# Altium PCB PCB1.PcbDoc
Units mm, origin at the board's own origin, x right, y up, seen from the top; angles counter-clockwise.
Board outline 46.99 x 78.23 mm, 2 copper layers (Top Layer, Bottom Layer); 55 components, 62 nets, 252 pads, 46 vias.
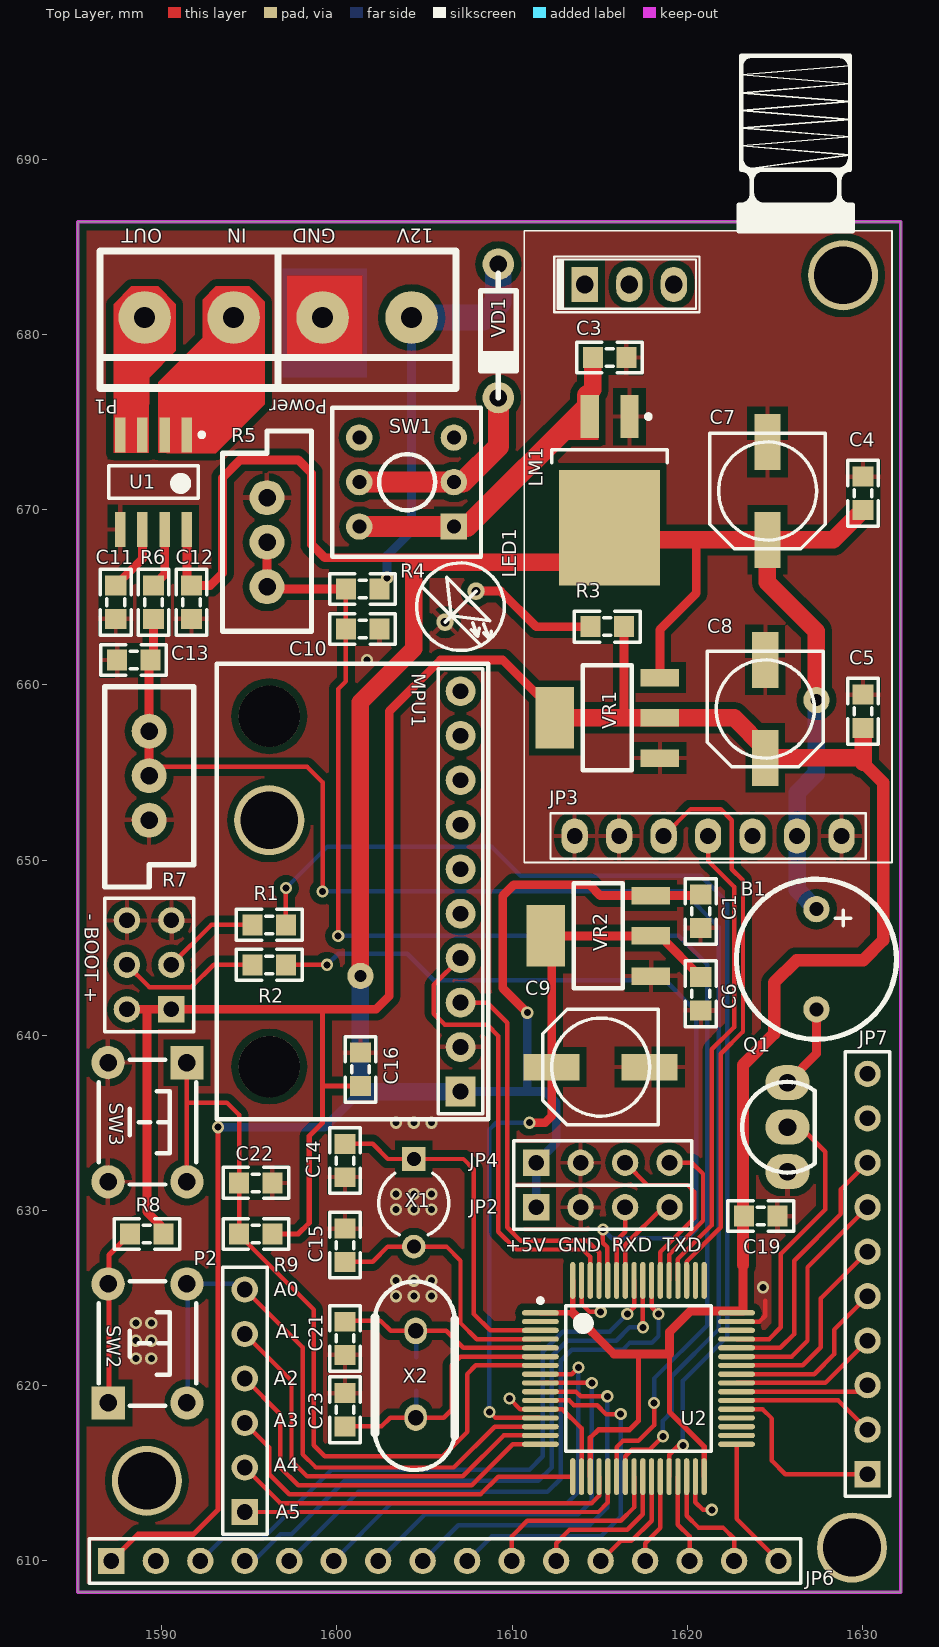
[diagram p0: Top Layer view]
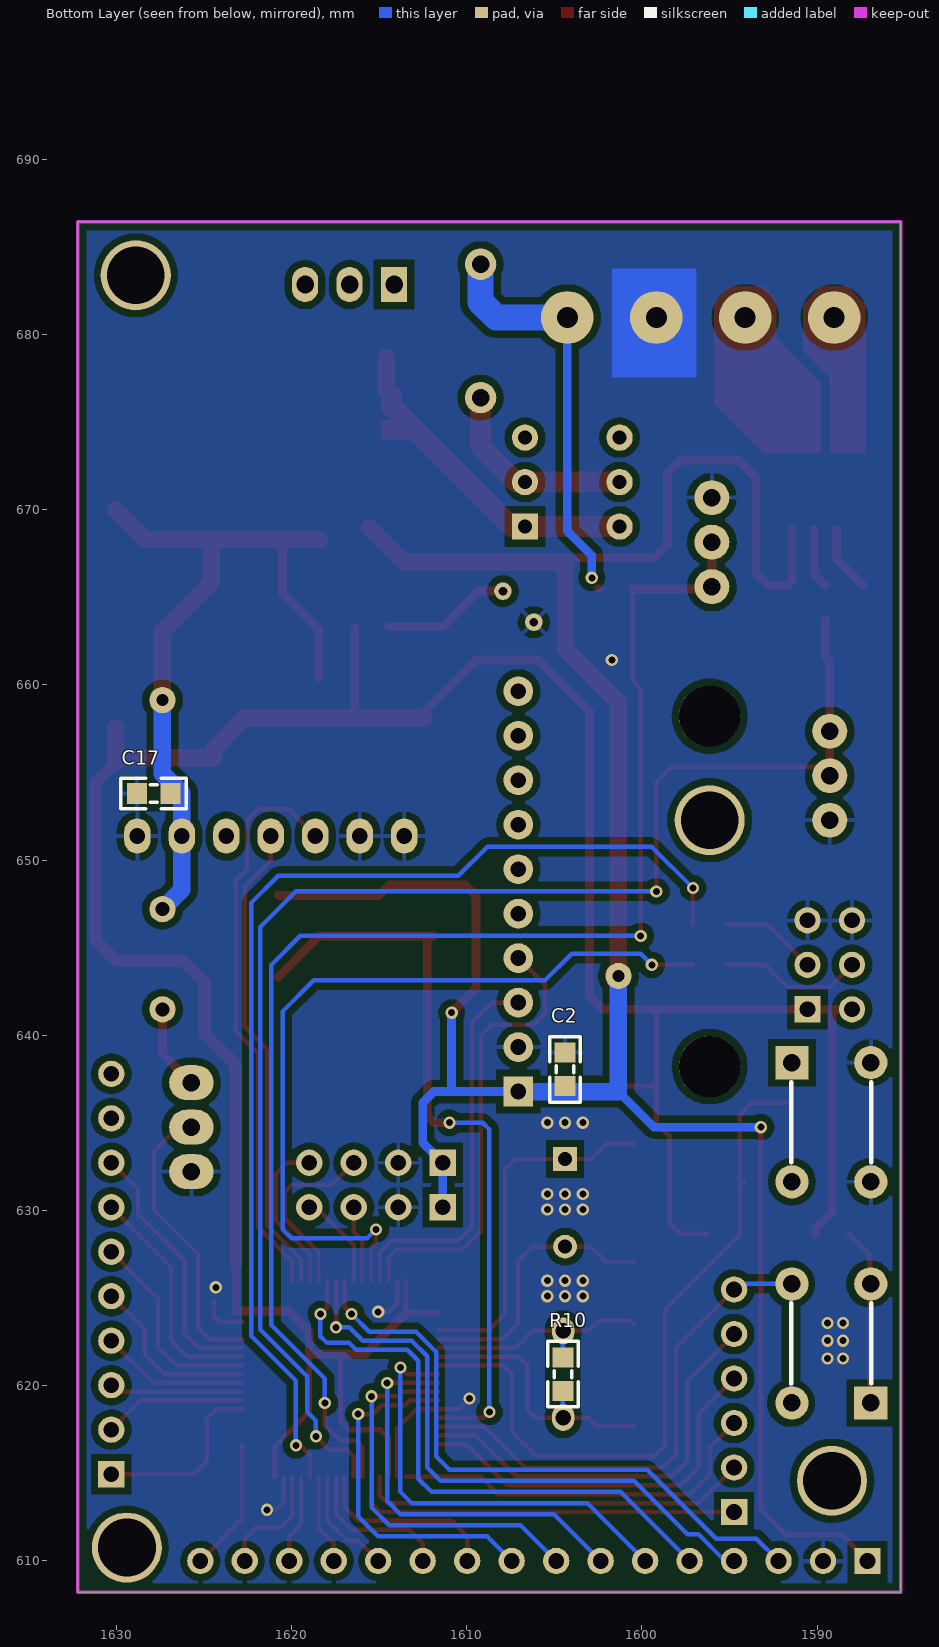
[diagram p1: Bottom Layer view, seen from below]

## Layer stack, top to bottom
Top Solder: solder mask 0.0102, Solder Resist, Dk 3.5
Top Layer: signal copper 0.0356
Dielectric1: dielectric 0.32, FR-4, Dk 4.8
Bottom Layer: signal copper 0.0356
Bottom Solder: solder mask 0.0102, Solder Resist, Dk 3.5

## Board outline
1585.214,608.203 1632.204,608.203 1632.204,686.435 1585.214,686.435

## Design rules (kind name [scope] priority, off if disabled: settings)
Clearance [All] p1: gap=0.2
PolygonConnect [All] p1: connectstyle=Relief reliefconductorwidth=0.254 reliefentries=4 polygonreliefangle="90 Angle" airgapwidth=0.254
RoutingVias [All] p1: holewidth=0.4 width=0.7 viastyle="Through Hole" minholewidth=0.2 minwidth=0.4 maxholewidth=0.7 maxwidth=1
SolderMaskExpansion [All] p1: expansion=0.102
Width [All] p1: maxlimit=2 minlimit=0.254 preferedwidth=0.254
30 further rules are at their usual default settings.

## Components (designator, comment, footprint, x,y, rotation, side; value= is the part's Value field where it differs from the comment)
"- BOOT +" "Header3X2" HDR2X3 1590.548,641.477 r90 top (schematic designator JP1)
B1 "DC5V" 123 1627.378,647.192 r270 top
C1 "104" 0805 1620.774,647.065 r270 top
C2 "104" 0805 1604.391,638.048 r90 bottom
C3 "104" 0805 1615.567,678.688 r0 top
C4 "104" 0805 1630.045,670.941 r90 top
C5 "104" 0805 1630.045,658.495 r90 top
C6 "104" 0805 1620.774,642.366 r270 top
C7 "220uF" CC6.56.5 1624.584,671.068 r90 top
C8 "220uF" CC6.56.5 1624.457,658.622 r90 top
C9 "220uF" CC6.56.5 1615.059,638.175 r0 top
C10 "104" 0805 1601.47,663.194 r0 top
C11 "1nF" 0805 1587.373,664.718 r270 top
C12 "104" 0805 1591.691,664.718 r90 top
C13 "104" 0805 1588.389,661.416 r180 top
C14 "10pf" 0805 1600.454,632.841 r90 top
C15 "10pf" 0805 1600.454,628.015 r270 top
C16 "104" 0805 1601.343,638.048 r270 top
C17 "104" 0805 1627.886,653.796 r180 bottom
C19 "104" 0805 1624.203,629.666 r180 top
C21 "22pf" 0805 1600.454,622.681 r270 top
C22 "104" 0805 1595.374,631.571 r0 top
C23 "22pf" 0805 1600.454,618.617 r90 top
JP2 "HDR-1X4" HDR1X4 1611.376,630.174 r0 top
JP3 "HDR-1X7" 射频模块 1622.044,670.56 r90 top
JP4 "HDR-1X4" HDR1X4 1611.376,632.714 r0 top
JP6 "HDR-1X16" HDR1X16 1587.119,609.981 r0 top
JP7 "HDR-1X8" HDR1X10 1630.299,614.934 r90 top
LED1 "电源指示灯" 5mmLED 1607.058,664.464 r225 top
LM1 "LM7805CT" TO228P1000X235-3N1 1615.567,671.068 r270 top
MPU1 "HDR-1X10" HDR-1X10_M 1607.058,636.778 r90 top
P1 "Header 2" "2p 5.08" 1589.024,680.974 r0 top
P2 "Header 6" HDR1X6 1594.739,612.775 r90 top
Power "HDR-1X2" "2p 5.08" 1604.264,680.974 r180 top
Q1 "SS8050" 小功率三极管 1625.727,634.746 r90 top
R1 "10k" 0805 1596.136,646.303 r180 top
R2 "10k" 0805 1596.136,644.017 r180 top
R3 "512" 0805 1615.44,663.321 r180 top
R4 "10k" 0805 1601.47,665.48 r180 top
R5 "RPot" 精密可调电位器 1596.009,670.687 r270 top
R6 "2.2k" 0805 1589.532,664.718 r270 top
R7 "RPot" 精密可调电位器 1589.278,652.272 r90 top
R8 "10k" 0805 1589.151,628.65 r180 top
R9 "10k" 0805 1595.374,628.65 r0 top
R10 "1M" 0805 1604.518,620.649 r270 bottom
SW1 "KET 7X7" BTN8.5*8.5 1606.677,669.036 r180 top
SW2 "6x6x5" 按钮#1 1591.437,618.998 r270 top
SW3 "6x6x5" 按钮#2 1591.437,638.429 r90 top
U1 "ACS712" "SOP8 - duplicate" 1589.532,671.576 r270 top
U2 "STM32F103RCT6" STM-LQFP64_M 1617.218,620.395 r0 top
VD1 "1N4007" 二极管 1609.217,684.022 r270 top
VR1 "AMS1117-3.3" SOT-223 1615.44,658.114 r0 top
VR2 "AMS1117-3.3" SOT-223 1614.932,645.668 r0 top
X1 "32.768K" CAPR5-4X5 1604.391,630.428 r270 top
X2 "8MHz" 直插晶振 1604.518,620.649 r270 top

## Footprints (in the part's own frame and the unit in brackets; to place one, negate y for a bottom-side part, rotate by r counter-clockwise, add the part's x,y. Pads: shape width x height; smd on the part's side, far side on the other; paste and mask are expansions set on the pad)
"2p 5.08" [mm]
  round 3 hole 1.2: 1(0,0) 2(5.08,0)
  silkscreen extent -2.6,-4.24 7.68,3.81
5mmLED [mm]
  round 1 hole 0.5: 1(-1.25,0) 2(1.25,0)
  silkscreen extent -2.5,-2.5 2.5,2.5
123 [mm]
  round 1.5 hole 0.8: 1(0,0) 2(5.715,0)
  silkscreen extent -1.71,-4.57 7.43,4.57
0805 [mm] "Chip Capacitor, 2-Leads, Body 2.0x1.2mm, IPC Medium Density"
  rect 1.14x1.2 smd: 1(-0.955,0) 2(0.955,0)
  silkscreen extent -1.88,-0.87 1.88,0.87, body extent -1,-0.6 1,0.6, height 0.5
BTN8.5*8.5 [mm]
  rect 1.5x1.5 hole 0.8: 1(0,0)
  round 1.5 hole 0.8: 2(0,-2.54) 3(0,-5.08) 4(5.4,-5.08) 5(5.4,-2.54) 6(5.4,0)
  silkscreen extent -1.55,-6.79 6.95,1.71
CAPR5-4X5 [mm] "Capacitor; 2 Leads"
  rect 1.35x1.35 hole 0.8: 1(-2.5,0)
  round 1.35 hole 0.8: 2(2.5,0)
  silkscreen extent -1.69,-2 1.82,2
CC6.56.5 [mm]
  rect 3.2x1.5 smd: 1(-2.794,0) 2(2.8,0)
  silkscreen extent -3.3,-3.3 3.3,3.3
HDR1X4 [mm] "Connector; Header; 4 Position"
  rect 1.5x1.5 hole 0.9: 1(0,0)
  round 1.5 hole 0.9: 2(2.54,0) 3(5.08,0) 4(7.62,0)
  silkscreen extent -1.27,-1.27 8.89,1.27
HDR1X6 [mm] "Connector; Header; 6 Position"
  rect 1.5x1.5 hole 0.9: 1(0,0)
  round 1.5 hole 0.9: 2(2.54,0) 3(5.08,0) 4(7.62,0) 5(10.16,0) 6(12.7,0)
  silkscreen extent -1.27,-1.27 13.97,1.27
HDR1X10 [mm] "Connector; Header; 10 Position"
  rect 1.5x1.5 hole 0.9: 1(0,0)
  round 1.5 hole 0.9: 2(2.54,0) 3(5.08,0) 4(7.62,0) 5(10.16,0) 6(12.7,0) 7(15.24,0) 8(17.78,0) 9(20.32,0) 10(22.86,0)
  silkscreen extent -1.27,-1.27 24.13,1.27
HDR1X16 [mm] "Connector; Header; 16 Position"
  rect 1.5x1.5 hole 0.9: 1(0,0)
  round 1.5 hole 0.9: 2(2.54,0) 3(5.08,0) 4(7.62,0) 5(10.16,0) 6(12.7,0) 7(15.24,0) 8(17.78,0) 9(20.32,0) 10(22.86,0) 11(25.4,0) 12(27.94,0) 13(30.48,0) 14(33.02,0) 15(35.56,0) 16(38.1,0)
  silkscreen extent -1.27,-1.27 39.37,1.27
HDR2X3 [mm] "Connector; Header; 3x2 Position"
  rect 1.5x1.5 hole 0.9: 1(0,0)
  round 1.5 hole 0.9: 2(0,2.54) 3(2.54,0) 4(2.54,2.54) 5(5.08,0) 6(5.08,2.54)
  silkscreen extent -1.27,-1.27 6.35,3.81
HDR-1X10_M [mm] "排母，10脚"
  rect 1.7x1.7 hole 0.9: 1(0,0)
  round 1.7 hole 0.9: 2(2.54,0) 3(5.08,0) 4(7.62,0) 5(10.16,0) 6(12.7,0) 7(15.24,0) 8(17.78,0) 9(20.32,0) 10(22.86,0)
  silkscreen extent -1.27,-1.27 24.13,1.27, body extent -1.27,-1.27 24.13,1.27, height 8.5
"SOP8 - duplicate" [mm] "SOP, 8-Leads, Body 5.1x4.0mm (max), Pitch 1.27mm, IPC Medium Density"
  rect 2x0.6 smd: 1(-2.7,1.905) 2(-2.7,0.635) 3(-2.7,-0.635) 4(-2.7,-1.905) 5(2.7,-1.905) 6(2.7,-0.635) 7(2.7,0.635) 8(2.7,1.905)
  silkscreen extent -2.82,-2.55 0.92,2.88, body extent -2,-2.55 2,2.55, height 1.75
SOT-223 [mm]
  rect 2.2x1 smd: 1(3,-2.3) 2(3,0) 3(3,2.3)
  rect 2.2x3.5 smd: 2(-3,0)
  silkscreen extent -1.4,-3 1.4,3, body extent -3.49,-3.24 3.49,3.24, height 1.64
STM-LQFP64_M [mm] "Thin QFP, 64-Leads, Body 10x10mm, Pitch 0.5mm, IPC Low Density"
  oval 2.1x0.3 smd: 1(-5.6,3.75) 2(-5.6,3.25) 3(-5.6,2.75) 4(-5.6,2.25) 5(-5.6,1.75) 6(-5.6,1.25) 7(-5.6,0.75) 8(-5.6,0.25) 9(-5.6,-0.25) 10(-5.6,-0.75) 11(-5.6,-1.25) 12(-5.6,-1.75) 13(-5.6,-2.25) 14(-5.6,-2.75) 15(-5.6,-3.25) 16(-5.6,-3.75) 33(5.6,-3.75) 34(5.6,-3.25) 35(5.6,-2.75) 36(5.6,-2.25) 37(5.6,-1.75) 38(5.6,-1.25) 39(5.6,-0.75) 40(5.6,-0.25) 41(5.6,0.25) 42(5.6,0.75) 43(5.6,1.25) 44(5.6,1.75) 45(5.6,2.25) 46(5.6,2.75) 47(5.6,3.25) 48(5.6,3.75)
  oval 0.3x2.1 smd: 17(-3.75,-5.6) 18(-3.25,-5.6) 19(-2.75,-5.6) 20(-2.25,-5.6) 21(-1.75,-5.6) 22(-1.25,-5.6) 23(-0.75,-5.6) 24(-0.25,-5.6) 25(0.25,-5.6) 26(0.75,-5.6) 27(1.25,-5.6) 28(1.75,-5.6) 29(2.25,-5.6) 30(2.75,-5.6) 31(3.25,-5.6) 32(3.75,-5.6) 49(3.75,5.6) 50(3.25,5.6) 51(2.75,5.6) 52(2.25,5.6) 53(1.75,5.6) 54(1.25,5.6) 55(0.75,5.6) 56(0.25,5.6) 57(-0.25,5.6) 58(-0.75,5.6) 59(-1.25,5.6) 60(-1.75,5.6) 61(-2.25,5.6) 62(-2.75,5.6) 63(-3.25,5.6) 64(-3.75,5.6)
  silkscreen extent -5.72,-4.15 4.15,4.57, body extent -5,-5 5,5, height 1.6
TO228P1000X235-3N1 [mm] "D-PAK, 3-Pads, Body 6.0x6.6mm (max), IPC Medium Density"
  rect 2.45x1.05 smd: 1(-4.25,1.14) 2(-4.25,-1.14)
  rect 6.6x5.75 smd: 3(2.1,0)
  silkscreen extent -4.37,-3.3 -1.6,3.3, body extent -2.35,-3.3 3.65,3.3, height 2.35
二极管 [mm]
  round 1.8 hole 1: 1(0,0) 2(7.62,0)
  silkscreen extent 0.51,-1.02 7.62,1.02
射频模块 [mm]
  oval 2x1.5 hole 0.9: 1(-19.191,-6.77) 2(-19.191,-4.23) 3(-19.191,-1.69) 4(-19.191,0.85) 5(-19.191,3.39) 6(-19.191,5.93) 7(-19.191,8.47)
  oval 2x1.5 hole 1: a(12.299,2.81) a(12.299,5.35)
  rect 2x1.5 hole 1: a(12.299,7.89)
  silkscreen extent -20.7,-9.65 25.35,11.35
小功率三极管 [mm]
  oval 2x2.54 hole 1: 1(-2.54,0) 2(0,0) 3(2.54,0)
  silkscreen extent -2.59,-1.55 2.59,2.59
按钮#1 [mm]
  round 1.9 hole 1: 1(0,0) 3(-6.8,-4.5) 4(-6.8,0)
  rect 1.9x1.9 hole 1: 2(0,-4.5)
  silkscreen extent -6.96,-5.04 0.16,0.54, body extent -7.51,-5.25 0.71,0.75, height 3.55
按钮#2 [mm]
  rect 1.9x1.9 hole 1: 1(0,0)
  round 1.9 hole 1: 2(0,4.5) 3(-6.8,4.5) 4(-6.8,0)
  silkscreen extent -6.96,-0.54 0.16,5.04, body extent -7.51,-0.75 0.71,5.25, height 5.95
直插晶振 [mil]
  oval 60x50 hole 35: 1(-97.13,-0.79) 2(97.87,-0.79)
  silkscreen extent -208,-93 216,87
精密可调电位器 [mm]
  round 2 hole 1: 1(5.08,0) 2(2.54,0) 3(0,0)
  silkscreen extent -3.81,-2.54 7.62,2.54

## Part data
"- BOOT +": library part "Header 3X2", "3*2P接插件"
B1: library part BEEP, "蜂鸣器"
C1 C2 C3 C4 C5 C6 C10 C11 C12 C13 C14 C15 C16 C17 C19 C21 C22 C23: library part C, "无极性贴片电容"
C7 C8 C9: library part CAP
JP2 JP4: library part "Header 4", "4P接插件"
JP3: library part "Header 7", "7P接插件"
JP6: library part "Header 16", "16P接插件"
JP7: library part "Header 8", "8P接插件"
LED1: library part LED-3MM, "插件LED"
MPU1: library part "Header 10", "10P接插件"
P1: "Header, 2-Pin"
P2: "Header, 6-Pin"
Power: library part "Header 2", "2P接插件"
Q1: library part 8050-DIP, "高频放大-NPN型"
R1 R2 R3 R4 R6 R8 R9 R10: library part R, "贴片电阻"
R5 R7: "Potentiometer"
SW1: "7*7自锁开关"
SW2 SW3: library part "TSW DIP-6x6", "直插6x6轻触开关"
U2: "ARM Cortex-M3 32-bit MCU, 256 KB Flash, 48 KB Internal RAM, 51 I/Os, 64-pin LQFP, -40 to 85 degC, Tray"
VD1: "整流二极管"
VR1 VR2: library part "SOT-223 AMS1117-3.3", "低压差线性稳压(LDO)"
X1 X2: library part XTAL-2, "2脚晶振"

## Free pads (board coordinates)
  round 3.5 hole 3.5: 0(1596.138,638.204) 0(1596.138,658.204)
  round 1.5 hole 0.7: 0(1627.378,659.13) 1(1601.343,643.382)
  round 4 hole 3.3: 3(1589.151,614.553) 3(1596.136,652.272) 3(1628.902,683.387) 3(1629.41,610.743)

## Via types
v1: diameter 0.7, hole 0.4, Top Layer to Bottom Layer, 46 vias

## Nets (pads, with @x,y where several pads share a name; then routed paths per layer and width w, separated by ;. In a path a pad name is that pad's centre, name@x,y a point inside that pad or via, vN(x,y) a via of type N, cw(c..) or ccw(c..) an arc to the next point about the centre after c; other vN are vias at no path point)
A0: P2.6 SW2.1 SW2.4 U2.14 | length 36.3
  Top Layer w0.254: P2.6@1594.416,625.798 P2.6 1598.041,622.173 1598.041,616.077 1598.803,615.315 1606.677,615.315 1609.007,617.645 U2.14
  Bottom Layer w0.254: SW2.1@1591.492,618.998 1591.492,625.798 1594.416,625.798 P2.6
A1: P2.5 U2.15 | length 23.9
  Top Layer w0.254: P2.5 1597.406,620.268 1597.406,615.696 1598.295,614.807 1607.185,614.807 1609.523,617.145 U2.15
A2: P2.4 U2.16 | length 22.2
  Top Layer w0.254: P2.4 1596.771,618.363 1596.771,615.315 1597.787,614.299 1607.693,614.299 1610.039,616.645 U2.16
A3: P2.3 U2.17 | length 21.7
  Top Layer w0.254: P2.3 1596.136,616.458 1596.136,614.934 1597.279,613.791 1608.201,613.791 1609.205,614.795 U2.17
A4: P2.2 U2.20 | length 22.3
  Top Layer w0.254: P2.2 1596.771,613.283 1614.551,613.283 1614.968,613.7 U2.20
A5: P2.1 U2.21 | length 22.4
  Top Layer w0.254: P2.1 1614.932,612.775 1615.468,613.311 U2.21
A6: C10.1 R4.2 R5.1 R5.2 U2.22 | length 80.8
  Top Layer w0.254: v1(1600.073,645.668) 1600.073,659.765 1600.515,660.207 C10.1 R4.2 ; U2.22 1615.968,616.478 1616.329,616.839 1617.218,616.839 1618.107,617.728 v1(1618.107,618.998)
  Top Layer w0.5: R5.2 R5.1 1596.136,665.48 R4.2
  Bottom Layer w0.254: v1(1600.073,645.668) 1619.504,645.668 1621.155,644.017 1621.155,623.443 1618.107,620.395 v1(1618.107,618.998)
A7: C13.1 R6.2 R7.1 R7.2 U2.23 | length 84.7
  Top Layer w0.254: R7.2 1589.786,655.32 1598.295,655.32 1599.184,654.431 v1(1599.184,648.208) ; U2.23 1616.468,615.962 1616.837,616.331 1617.853,616.331 v1(1618.615,617.093)
  Top Layer w0.5: R7.2 R7.1 1589.278,661.35 1589.532,661.604 R6.2
  Bottom Layer w0.254: v1(1599.184,648.208) 1606.423,648.208 ; 1605.153,648.208 1606.423,648.208 ; v1(1618.615,617.093) 1618.615,617.982 1619.123,618.49 1619.123,620.522 1621.79,623.189 1621.79,646.176 1619.758,648.208 1606.423,648.208
BOOT0: R2.1 U2.60 | length 46.3
  Top Layer w0.254: R2.1 v1(1599.438,644.017) ; v1(1615.186,628.904) 1615.186,628.142 1615.445,627.883 1615.445,626.018 U2.60
  Bottom Layer w0.254: v1(1599.438,644.017) 1600.073,644.652 1604.01,644.652 1605.534,643.128 1618.742,643.128 1620.52,641.35 1620.52,628.904 1620.012,628.396 1615.694,628.396 v1(1615.186,628.904)
BOOT1: R1.1 U2.28 | length 63.9
  Top Layer w0.254: R1.1 v1(1597.091,648.401) ; U2.28 1618.968,616.049 1619.504,616.585 v1(1619.758,616.585)
  Bottom Layer w0.254: v1(1597.091,648.401) 1599.438,650.748 1608.836,650.748 1610.487,649.097 1620.774,649.097 1622.298,647.573 1622.298,622.808 1619.758,620.268 v1(1619.758,616.585)
GND: "- BOOT +.5" "- BOOT +.6" C1.2 C2.2 C3.2 C4.2 C5.2 C6.2 C7.2 C8.2 C9.2 C10.2 C11.2 C12.1 C13.2 C14.1 C15.1 C16.1 C17.1 C19.1 C21.2 C22.2 C23.2 JP2.2 JP3.1 JP3.6 JP3.7 JP4.2 JP6.2 LED1.2 LM1.1 MPU1.2 Power.2 Q1.1 R5.3 R7.3 SW3.2 SW3.3 U1.5 U2.12 U2.18 U2.31 U2.47 U2.63 VR1.1 VR2.1 | length 15.7
  Top Layer w0.254: v1(1603.375,635) v1@1603.629,635 ; v1(1609.852,619.252) 1610.459,618.645 U2.12 1612.872,618.645 1613.968,617.549 U2.18 ; U2.63 1613.968,624.661 1614.424,624.205 v1(1615.059,624.205) ; U2.31 1620.468,613.335 1620.901,612.902 v1(1621.409,612.902) ; U2.47 1624.127,623.645 1624.457,623.975 1624.457,624.84
  other v1: 1588.516,621.538 1589.405,621.538 1588.516,622.554 1589.405,622.554 1588.516,623.57 1589.405,623.57 1603.375,625.094 1604.391,625.094 1605.407,625.094 1624.33,625.602 1603.375,625.983 1604.391,625.983 1605.407,625.983 1603.375,630.047 1604.391,630.047 1605.407,630.047 1603.375,630.936 1604.391,630.936 1605.407,630.936 1604.391,635 1605.407,635 1601.724,661.416
NetB1_2: B1.2 Q1.3 | length 4.9
  Top Layer w0.5: Q1.3 1627.378,638.937 B1.2
NetC11_1: C11.1 U1.6 | length 3.8
  Top Layer w0.5: C11.1 1588.897,667.197 U1.6
NetC14_2: C14.2 U2.3 X1.1 | length 20.4
  Top Layer w0.254: C14.2 1602.039,633.796 1602.907,632.928 X1.1 1607.225,632.928 1607.82,632.333 1607.82,624.078 1608.753,623.145 U2.3
NetC15_2: C15.2 U2.4 X1.2 | length 15.8
  Top Layer w0.254: C15.2 1602.039,627.06 1602.907,627.928 X1.2 1606.256,627.928 1607.058,627.126 1607.058,623.57 1607.983,622.645 U2.4
NetC21_1: C21.1 R10.1 U2.5 X2.1 | length 13.4
  Top Layer w0.254: C21.1@1600.454,623.509 1600.642,623.697 1602.486,623.697 1603.067,623.116 X2.1 1606.242,623.116 1607.213,622.145 U2.5
  Bottom Layer w0.254: X2.1 1604.518,623.096 R10.1
NetC22_1: C22.1 R9.1 SW3.1 SW3.4 U2.7 | length 48.3
  Top Layer w0.254: SW3.4 1591.437,636.143 ; SW3.1 1591.437,636.143 ; C22.1@1594.173,631.629 C22.1@1594.419,631.383 ; U2.7 1607.935,621.145 1607.439,620.649 1607.439,617.347 1606.042,615.95 1599.311,615.95 1598.676,616.585 1598.676,624.332 1594.419,628.589 R9.1 C22.1@1594.419,631.383 ; 1591.437,636.143 1593.723,636.143 1594.419,635.447 C22.1 C22.1@1594.419,631.383
NetC23_1: C23.1 R10.2 U2.6 X2.2 | length 15.8
  Top Layer w0.254: C23.1 1602.547,617.662 1603.048,618.163 X2.2 1606.096,618.163 1606.55,618.617 1606.55,621.157 1607.038,621.645 U2.6
  Bottom Layer w0.254: X2.2 1604.518,618.183 R10.2
NetJP1_3: "- BOOT +.3" R1.2 | length 5.6
  Top Layer w0.254: 1590.548,644.017 1592.834,646.303 R1.2
NetJP1_4: "- BOOT +.4" R2.2 | length 8.2
  Top Layer w0.254: 1588.008,644.017 1589.278,642.747 1591.691,642.747 1592.961,644.017 R2.2
NetLED1_1: LED1.1 R3.2 | length 7.4
  Top Layer w0.5: LED1.1@1607.947,665.353 1609.344,665.353 1611.376,663.321 R3.2
NetP1_1: P1.1 U1.3 U1.4
NetP1_2: P1.2 U1.1 U1.2
NetR6_1: R6.1 U1.7 | length 3.5
  Top Layer w0.5: R6.1 1590.167,666.308 U1.7
NetR8_2: R8.2 SW2.2 SW2.3 | length 10.2
  Top Layer w0.3: SW2.2@1586.992,618.998 1586.992,627.446 R8.2
NetSW1_2: SW1.2 SW1.5 VD1.2 | length 11.6
  Top Layer w1.2: SW1.5 1607.185,671.576 1609.217,673.608 VD1.2
PA12: Q1.2 U2.45 | length 16.6
  Top Layer w0.254: U2.45 1624.675,622.645 1625.346,623.316 1625.346,627.507 1627.886,630.047 1627.886,633.349 1626.489,634.746 Q1.2
PB0: JP6.12 U2.26 | length 6.4
  Top Layer w0.254: JP6.12 1616.202,611.124 1616.813,611.124 1617.968,612.279 U2.26
PB1: JP6.13 U2.27 | length 5.2
  Top Layer w0.254: JP6.13 1617.599,610.997 1618.468,611.866 U2.27
PB10: JP6.14 U2.29 | length 5.1
  Top Layer w0.254: U2.29 1619.468,612.049 1620.139,611.378 JP6.14
PB11: JP6.15 U2.30 | length 6.8
  Top Layer w0.254: U2.30 1619.968,612.565 1620.647,611.886 1622.044,611.886 1622.679,611.251 JP6.15
PB12: JP6.16 U2.33 | length 7.7
  Top Layer w0.254: U2.33 1622.818,612.382 JP6.16
PC0: JP6.6 U2.8 | length 25.2
  Top Layer w0.254: U2.8 1613.404,620.645 v1(1613.789,621.03)
  Bottom Layer w0.254: JP6.6 1603.121,613.283 1613.154,613.283 1613.789,613.918 v1(1613.789,621.03) v1@1613.916,620.903
PC1: JP6.7 U2.9 | length 23.3
  Top Layer w0.254: U2.9 1611.622,620.141 v1(1614.551,620.141)
  Bottom Layer w0.254: JP6.7 1605.026,612.648 1613.789,612.648 1614.551,613.41 v1(1614.551,620.141)
PC2: JP6.8 U2.10 | length 22.1
  Top Layer w0.254: U2.10 1613.65,619.645 1613.916,619.379 v1(1615.44,619.379)
  Bottom Layer w0.254: JP6.8 1606.931,612.013 1614.424,612.013 1615.44,613.029 v1(1615.44,619.379)
PC3: JP6.9 U2.11 | length 20.6
  Top Layer w0.254: U2.11 1613.261,619.145 1613.535,618.871 1614.859,618.871 1615.367,618.363 v1(1616.202,618.363)
  Bottom Layer w0.254: JP6.9 1608.836,611.378 1615.059,611.378 1616.202,612.521 v1(1616.202,618.363)
PC4: JP6.10 U2.24 | length 10.8
  Top Layer w0.254: JP6.10 1609.979,611.378 1610.868,612.267 1616.202,612.267 1616.968,613.033 U2.24
PC5: JP6.11 U2.25 | length 8.8
  Top Layer w0.254: JP6.11 1612.519,610.997 1613.281,611.759 1616.583,611.759 1617.468,612.644 U2.25
REF: C6.1 C9.1 U2.13 VR2.2 | length 42.8
  Top Layer w0.254: v1(1608.709,618.49) 1609.054,618.145 U2.13
  Top Layer w0.5: v1(1610.995,635) 1611.884,635 1612.265,635.381 C9.1 VR2.2@1612.265,645.335 ; VR2.2@1611.932,645.668 1617.932,645.668 1618.427,645.668 C6.1
  Bottom Layer w0.254: v1(1608.709,618.49) 1608.709,634.619 1609.09,635 v1(1610.995,635)
RXD_1: JP2.3 U2.59 | length 4.4
  Top Layer w0.254: U2.59 1615.968,628.289 1616.456,628.777 JP2.3
RXD_3: JP3.4 U2.52 | length 27.3
  Top Layer w0.254: U2.52 1619.468,627.217 1621.409,629.158 1621.409,639.191 1622.679,640.461 1622.679,648.462 1621.194,649.947 JP3.4
RXD_5: JP4.3 U2.54 | length 10.5
  Top Layer w0.254: JP4.3 1617.726,631.444 1620.012,631.444 1620.393,631.063 1620.393,629.539 1618.468,627.614 U2.54
SCL_1: MPU1.3 U2.61 | length 22.3
  Top Layer w0.254: MPU1.3 1608.582,641.858 1609.725,640.715 1609.725,629.031 1610.487,628.269 1614.297,628.269 1614.968,627.598 U2.61
SDA_1: MPU1.4 U2.62 | length 26.4
  Top Layer w0.254: MPU1.4 1605.534,642.874 1605.534,641.223 1606.169,640.588 1608.582,640.588 1609.217,639.953 1609.217,628.777 1610.233,627.761 1614.043,627.761 1614.468,627.336 U2.62
SPI_MISO1: JP6.4 U2.56 | length 34.7
  Top Layer w0.254: U2.56 1617.468,623.32 v1(1617.472,623.316)
  Bottom Layer w0.254: JP6.4 1595.254,609.981 1596.778,611.505 1597.406,611.505 1600.454,614.553 1611.503,614.553 1612.265,615.315 1612.265,621.665 1613.154,622.554 1615.948,622.554 1616.71,623.316 v1(1617.472,623.316)
SPI_MOSI1: JP6.3 U2.57 | length 35.8
  Top Layer w0.254: v1(1616.583,624.078) 1616.968,624.463 U2.57
  Bottom Layer w0.254: JP6.3 1593.469,611.251 1595.755,611.251 1599.692,615.188 1610.995,615.188 1611.757,615.95 1611.757,621.919 1612.9,623.062 1615.567,623.062 v1(1616.583,624.078)
SPI_SCK1: JP6.5 U2.55 | length 33.7
  Top Layer w0.254: U2.55 1617.968,624.471 v1(1618.361,624.078)
  Bottom Layer w0.254: JP6.5 1601.216,613.918 1612.011,613.918 1612.773,614.68 1612.773,621.411 1613.408,622.046 1616.329,622.046 1616.71,622.427 1617.98,622.427 1618.361,622.808 v1(1618.361,624.078)
TIM1_CH1: JP7.5 U2.41 | length 10.1
  Top Layer w0.254: U2.41 1627.247,620.645 1628.394,621.792 1628.394,623.189 JP7.5
TIM1_CH2: JP7.6 U2.42 | length 11.8
  Top Layer w0.254: U2.42 1626.604,621.145 1627.632,622.173 1627.632,624.967 JP7.6
TIM1_CH3: JP7.7 U2.43 | length 13.5
  Top Layer w0.254: U2.43 1625.961,621.645 1626.87,622.554 1626.87,626.745 JP7.7
TIM1_CH4: JP7.8 U2.44 | length 15.1
  Top Layer w0.254: U2.44 1625.318,622.145 1626.108,622.935 1626.108,627.126 1628.775,629.793 1628.775,631.19 JP7.8
TIM3_CH1: JP7.1 U2.37 | length 10.4
  Top Layer w0.254: U2.37 1624.302,618.645 1624.838,618.109 1624.838,615.696 1625.6,614.934 JP7.1
TIM3_CH2: JP7.2 U2.38 | length 8.2
  Top Layer w0.254: U2.38 1628.628,619.145 JP7.2
TIM3_CH3: JP7.3 U2.39 | length 7.6
  Top Layer w0.254: U2.39 1629.93,619.645 JP7.3
TIM3_CH4: JP7.4 U2.40 | length 8.5
  Top Layer w0.254: U2.40 1627.89,620.145 JP7.4
TXD_1: JP2.4 U2.58 | length 5.4
  Top Layer w0.254: U2.58 1616.468,628.027 1618.615,630.174 JP2.4
TXD_3: JP3.5 U2.51 | length 32.7
  Top Layer w0.254: JP3.5 1620.192,652.907 1621.917,652.907 1622.552,652.272 1622.552,649.478 1623.187,648.843 1623.187,640.207 1621.917,638.937 1621.917,629.024 1619.968,627.075 U2.51
TXD_5: JP4.4 U2.53 | length 9.1
  Top Layer w0.254: U2.53 1618.968,627.472 1620.901,629.405 1620.901,632.079 1620.266,632.714 JP4.4
VB: Power.1 R4.1 VD1.1 | length 23
  Top Layer w0.5: R4.1 R4.1@1602.486,665.48
  Bottom Layer w0.5: v1(1602.867,666.115) 1602.867,667.385 1604.264,668.782 Power.1
  Bottom Layer w1.5: Power.1 1608.328,680.974 1609.217,681.863 VD1.1
VCC3.3: "- BOOT +.1" "- BOOT +.2" C5.1 C8.1 C16.2 C19.2 R3.1 R8.1 R9.2 U2.1 U2.19 U2.32 U2.48 U2.64 VR1.2 | length 170.6
  Top Layer w0.3: R9.2 1597.787,628.65 1598.422,629.285 1598.422,634.238 1599.184,635 1599.184,637.032 ; 1599.184,641.477 1599.184,637.032 ; C16.2 1599.245,637.093 1599.184,637.032 ; U2.1 1613.468,624.145 U2.64 ; U2.19 1614.468,617.01 1614.932,617.474 1616.71,617.474 1617.218,617.982 1617.218,621.792 ; 1618.996,621.792 1618.996,618.49 1620.968,616.518 U2.32
  Top Layer w0.5: 1588.008,641.477 1589.151,641.477 ; 1589.151,635.127 1589.151,634.873 ; R8.1 1590.106,628.965 1589.151,629.92 1589.151,634.873 ; VR1.2@1612.44,658.114 1612.44,658.447 1609.471,661.416 1605.915,661.416 1602.994,658.495 1602.994,642.239 1602.232,641.477 1599.184,641.477 1590.548,641.477 1589.151,641.477 ; 1613.468,624.145 1615.821,621.792 1617.218,621.792 1618.996,621.792 1618.996,623.062 1620.179,624.245 1623.187,624.245 1623.187,626.872 ; R3.1 1616.395,658.175 1616.456,658.114 ; 1589.151,634.873 1589.151,641.477
  Top Layer w0.7: 1623.187,626.872 1623.187,638.302 1624.965,640.08 1624.965,643.001 1626.235,644.271 1630.045,644.271 1631.188,645.414 1631.188,654.431 1630.045,655.574
  Top Layer w1: VR1.2@1612.44,658.114 1616.456,658.114 1618.44,658.114 1622.679,658.114 1624.457,656.336 C8.1 1629.791,655.828 ; 1630.045,655.574 C5.1
VCC5: B1.1 C1.1 C2.1 C4.1 C7.1 C12.2 C17.2 JP2.1 JP3.2 JP4.1 JP6.1 LM1.3 MPU1.1 pad.0@1627.378,659.13 pad.1 U1.8 VR1.3 VR2.3 | length 196.1
  Top Layer w0.3: JP6.1 1588.643,611.505 1591.818,611.505 1593.215,612.902 v1(1593.215,634.746)
  Top Layer w0.5: U1.8 1591.437,665.927 C12.2 1592.773,665.673 1593.469,666.369 1593.469,671.83 1594.485,672.846 1597.787,672.846 1598.549,672.084 1598.549,668.02 1599.311,667.258 1606.042,667.258 1606.296,667.004 ; v1(1610.868,641.281) 1609.471,642.678 1609.471,647.954 1610.106,648.589 1614.424,648.589 1615.045,647.968 VR2.3 1620.722,647.968 C1.1 ; VR1.3 1618.44,663.146 1620.52,665.226 1620.52,668.274
  Top Layer w1: pad.1 1601.343,659.003 1604.391,662.051 1604.391,666.877 1604.518,667.004 1606.296,667.004 1613.603,667.004 LM1.3 ; LM1.3@1618.44,668.274 1620.52,668.274 C7.1 ; pad.0@1627.378,659.13 1627.378,663.067 1624.584,665.861 C7.1 ; C4.1 1628.333,668.274 C7.1
  Bottom Layer w0.5: v1(1593.215,634.746) 1599.311,634.746 1601.343,636.778 ; MPU1.1 1610.868,636.778 ; v1(1610.868,641.281) 1610.868,636.778 ; JP2.1 JP4.1 1612.519,633.857 1612.519,636.143 1611.884,636.778 1610.868,636.778
  Bottom Layer w1: pad.1 1601.343,642.493 1601.343,636.778 MPU1.1 ; B1.1 1626.274,648.296 JP3.2 1626.274,653.835 1627.378,654.939 pad.0@1627.378,659.13
VCC12: C3.1 LM1.2 SW1.1 SW1.6 | length 18.8
  Top Layer w1: LM1.2@1614.297,676.529 1614.612,676.844 C3.1
  Top Layer w1.2: SW1.6 SW1.1 1607.439,669.036 1614.297,675.894 LM1.2@1614.297,676.529
pads on no net: JP3.3 JP3.a JP7.9 JP7.10 MPU1.5 MPU1.6 MPU1.7 MPU1.8 MPU1.9 MPU1.10 SW1.3 SW1.4 U2.2 U2.34 U2.35 U2.36 U2.46 U2.49 U2.50

## Polygon pours and split planes (outlines as drawn)
GND on Bottom Layer "Top Layer-No Net" (solid, remove dead copper, pour order 0): 1585.214,686.435 1632.204,686.435 1632.204,608.203 1585.214,608.203 1585.214,686.435
GND on Top Layer "Top Layer-No Net" (solid, remove dead copper, pour order 2): 1585.214,686.435 1632.204,686.435 1632.204,608.203 1585.214,608.203 1585.214,686.435

## Keep-outs
Keep-Out Layer:
  the board outline again, w0.2

## Other copper
Top Layer:
  rectangle net GND: 1597.152,678.561 1601.47,683.387
  rectangle net NetP1_2: 1589.786,673.227 1591.818,676.021
  rectangle net NetP1_1: 1587.246,673.227 1589.278,676.021
  rectangle net VCC12: 1613.154,673.989 1614.932,675.132
  region net NetP1_2: 1589.786,675.64 1589.786,677.291 1592.326,679.831 1592.326,681.99 1593.088,682.752 1594.993,682.752 1595.882,681.863 1595.882,676.021 1593.088,673.227 1590.294,673.227 1590.04,673.481
  region net NetP1_1: 1587.246,675.259 1587.246,681.736 1588.262,682.752 1589.786,682.752 1590.802,681.736 1590.802,679.069 1589.278,677.545 1589.278,676.021
Bottom Layer:
  rectangle net GND: 1596.898,677.545 1601.724,683.768

## Silkscreen, mask and mechanical layers (free items; w line width, h text height)
Top Overlay:
  lines w0.254: 1593.138,635.204 1593.138,661.204 1608.638,661.204 1608.638,635.204 1593.138,635.204
  text "OUT" at 1590.04,686.054 h0.8 r180
  text "IN" at 1594.866,686.054 h0.8 r180
  text "GND" at 1599.946,686.054 h0.8 r180
  text "12V" at 1605.534,686.054 h0.8 r180
  text "+5V" at 1609.598,627.634 h0.8
  text "GND" at 1612.646,627.634 h0.8
  text "RXD" at 1615.694,627.634 h0.8
  text "TXD" at 1618.615,627.634 h0.8
  text "A0" at 1596.39,625.094 h0.8
  text "A1" at 1596.517,622.681 h0.8
  text "A2" at 1596.39,620.014 h0.8
  text "A3" at 1596.39,617.601 h0.8
  text "A4" at 1596.39,615.061 h0.8
  text "A5" at 1596.517,612.394 h0.8

## Dimensions
1585.214,608.203 to 1632.204,608.203 on Top Overlay
1585.214,686.435 to 1585.214,608.203 on Top Overlay